# Altium PCB KATADC_V1-3.PcbDoc (part 7 of 7)
Units mm, origin at the board's own origin, x right, y up, seen from the top; angles counter-clockwise.
Board outline 127 x 85.85 mm, 6 copper layers (Top Layer, InnerPlane1, InnerPlane2, InnerPlane3, InnerPlane4, Bottom Layer), stack 1.255 mm thick; 189 components, 188 nets, 905 pads, 1090 vias.
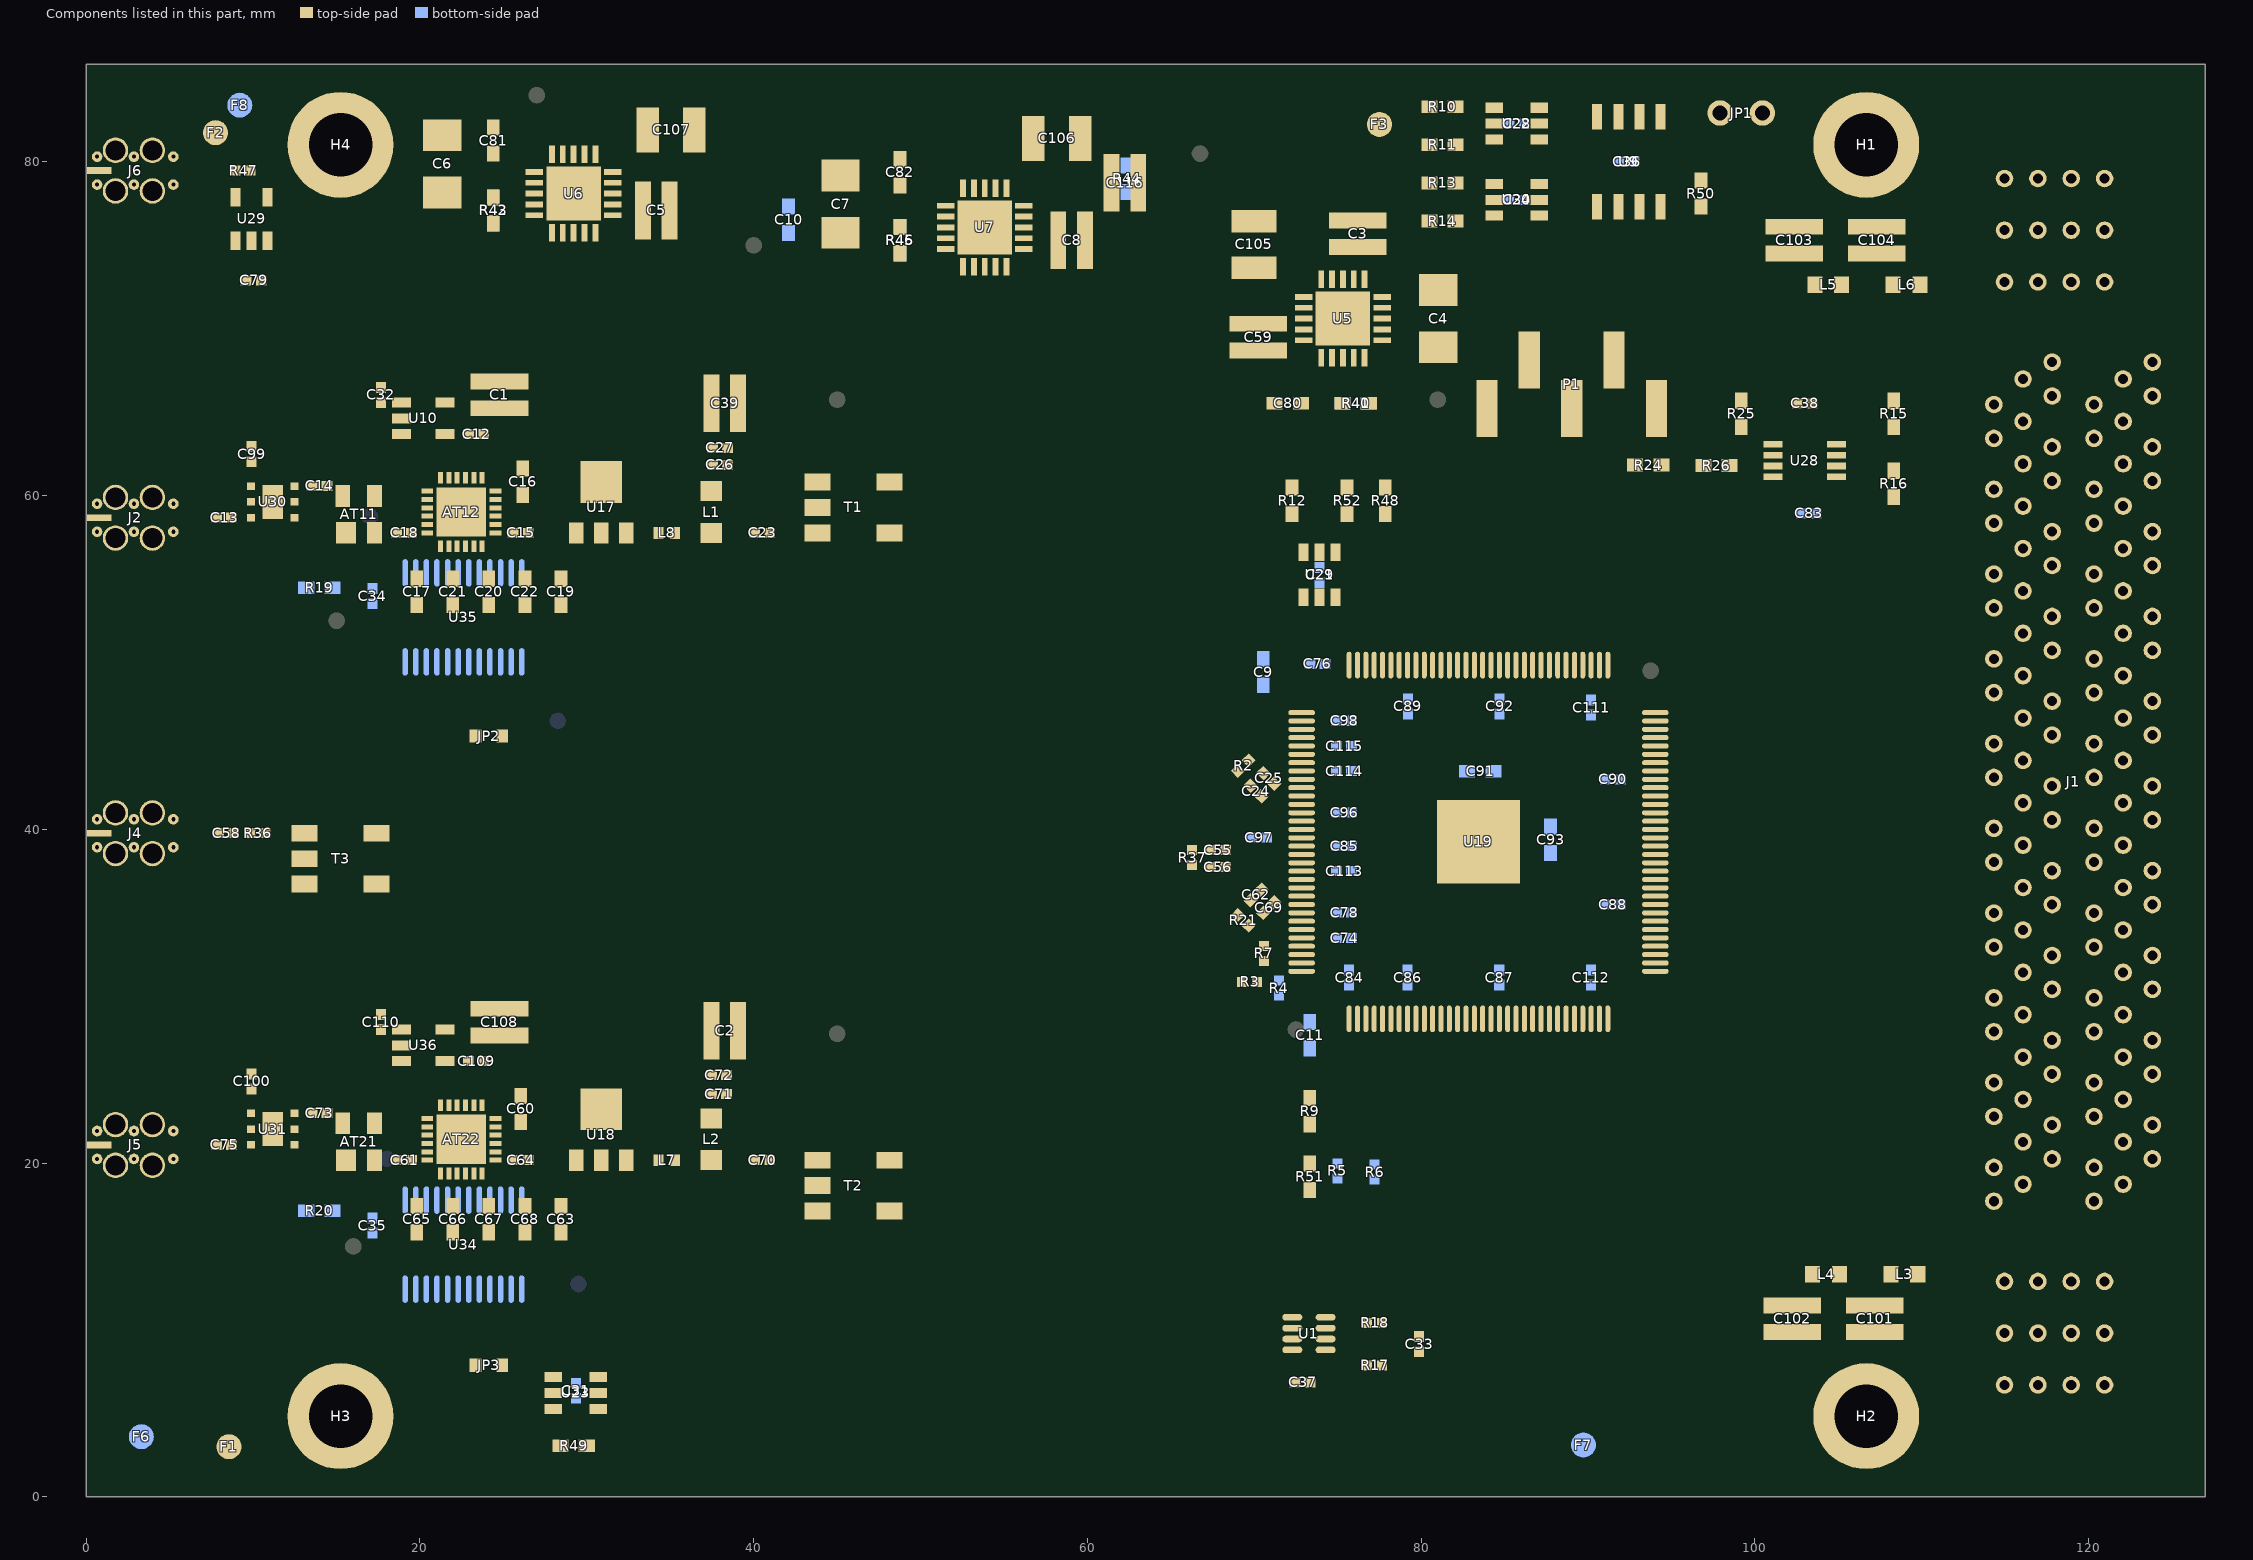
[diagram p11: the components of this part, seen from the top]

## Silkscreen, mask and mechanical layers (free items; w line width, h text height) (continued)
Cut-Drill Drawing:
  drawing of 978 lines, arcs and shapes, not listed
  text "ALL DIMENSIONS IN mm" at 250.443,215.847 h2.79
  text "P C B    F A B R I C A T I O N    N O T E S" at -254.557,214.847 h5
  text "0" at 255.57,213.226 h2.79
  text "5" at 260.57,213.226 h2.79
  text "10" at 264.633,213.226 h2.79
  text "15" at 269.633,213.226 h2.79
  text "20" at 274.633,213.226 h2.79
  text "V-GROOVE DETAIL" at -103.232,210.097 h5
  text "MOUSEBITE BREAKAWAY DETAIL" at 118.068,209.897 h5
  text "CONSTRUCTION" at -252.557,209.847 h3.5
  text "CHAMFER DETAIL" at 12.068,208.897 h5
  text "Scale in Millimeters" at 255.975,207.769 h2.79
  text "FAB SPECIFICATION" at -252.557,205.847 h2.79
  text "IPC-6012 CLASS" at -218.557,205.847 h2.79
  text "1" at -194.557,205.847 h2.79
  text "2" at -188.557,205.847 h2.79
  text "3" at -182.557,205.847 h2.79
  text "MIL-SPEC P-55110" at -168.557,205.847 h2.79
  text "APPLY TO PANELISED PCB IF APPLICABLE" at 127.068,204.897 h2.79
  text "APPLY TO PANELISED PCB IF APPLICABLE AND REQUESTED" at -120.882,204.307 h2.79
  text "LEAD-FREE RoHS" at -252.557,202.847 h2.79
  text "YES TO EU DIRECTIVE" at -215.557,202.847 h2.79
  text "NOT REQD" at -180.557,202.847 h2.79
  text "GOLD FINGER EDGE CONNECTOR" at 10.568,201.647 h2.79
  text "MATERIAL" at -252.557,199.847 h2.79
  text "SEE STACKUP DETAIL" at -218.557,199.847 h2.79
  text "APPLY IF APPLICABLE AND REQUESTED IN NOTES" at 0.318,197.147 h2.79
  text "FINAL PCB THICKNESS" at -252.557,196.847 h2.79
  text "0.8mm" at -215.557,196.847 h2.79
  text "1.2mm" at -201.557,196.847 h2.79
  text "1.6mm" at -189.557,196.847 h2.79
  text "2.4mm" at -176.557,196.847 h2.79
  text "OTHER_____mm" at -163.557,196.847 h2.79
  text "LAYER COUNT" at -252.557,193.847 h2.79
  text "1" at -215.557,193.847 h2.79
  text "2" at -208.557,193.847 h2.79
  text "4" at -201.557,193.847 h2.79
  text "6" at -194.557,193.847 h2.79
  text "8" at -187.557,193.847 h2.79
  text "10" at -180.557,193.847 h2.79
  text "12" at -173.557,193.847 h2.79
  text "OTHER_____" at -163.557,193.847 h2.79
  text "MAIN PCB AREA" at 164.843,193.797 h2.79
  text "PCB WIDTH" at -98.877,192.664 h2.79
  text "V-GROOVE WIDTH" at -81.924,192.664 h2.79
  text "GAP" at -49.033,192.664 h2.79
  text "LAYER STACK-UP" at -252.557,190.847 h2.79
  text "SEE DETAIL DRAWING" at -218.557,190.847 h2.79
  text "0.00mm" at 116.918,189.822 h2.79 r90
  text "3.50mm" at 123.843,189.822 h2.79 r90
  text "4.50mm" at 125.918,189.822 h2.79 r90
  text "1.00mm" at 118.968,189.797 h2.79 r90
  text "2.25mm" at 121.443,189.797 h2.79 r90
  text "0,80mm" at -94.212,188.432 h2.79
  text "0,16mm +/- 0,10mm" at -80.734,188.299 h2.79
  text "0,3mm +/- 0,10mm" at -54.797,188.299 h2.79
  text "IMPEDENCE CONTROL" at -252.557,187.847 h2.79
  text "YES" at -215.557,187.847 h2.79
  text "NO" at -201.557,187.847 h2.79
  text "IF YES, SPECIFY Zo ___100 ohm__" at -190.557,187.847 h2.79
  text "GAP" at -109.721,187.664 h2.79
  text "SPECIAL CORES" at -252.557,184.847 h2.79
  text "YES" at -215.557,184.847 h2.79
  text "NO" at -201.557,184.847 h2.79
  text "SEE STACKUP DETAIL" at -190.557,184.847 h2.79
  text "1,60mm" at -94.212,184.622 h2.79
  text "0,50mm +/- 0,10mm" at -80.877,184.622 h2.79
  text "0,4mm +/- 0,10mm" at -54.842,184.622 h2.79
  text "BOARD EDGE" at -252.557,181.847 h2.79
  text "NO METAL BURRS AND SHARP EDGES" at -218.557,181.847 h2.79
  text "0,80mm +/- 0,10mm" at -80.734,180.934 h2.79
  text "0,5mm +/- 0,10mm" at -54.797,180.934 h2.79
  text "2,40mm" at -94.212,180.812 h2.79
  text "1.75mm" at 146.543,179.772 h2.79 r90
  text "3.0mm" at 201.243,179.022 h2.79 r90
  text "BOW & TWIST" at -252.557,178.847 h2.79
  text "1% MAX ON SMD PCBS" at -218.557,178.847 h2.79
  text "DIA 0,8mm" at 114.613,177.818 h2.79
  text "BREAKAWAY STRIP" at 162.443,176.997 h2.79
  text "O" at 24.398,176.414 h2.79
  text "MAX DEVIATION 0,10mm" at -134.217,176.367 h2.79
  text "PROFILING" at -252.557,175.847 h2.79
  text "NC-ROUTE" at -215.557,175.847 h2.79
  text "V-SCORE" at -194.557,175.847 h2.79
  text "BOTH AS INDICATED" at -173.557,175.847 h2.79
  text "X 5PL" at 116.913,175.718 h2.79
  text "80" at 21.805,175.364 h2.79
  text "1.20mm" at 45.568,170.647 h2.79 r90
  text "MOUSEBITE MUST BE APPLIED WHEREVER                IS INDICATED ON THE PCB" at 99.568,169.897 h3
  text "CONDUCTIVE MATERIAL" at -252.557,169.347 h3.5
  text "CU THICKNESS INTERNAL" at -252.557,165.347 h2.79
  text "18um" at -215.557,165.347 h2.79
  text "35um" at -201.557,165.347 h2.79
  text "70um" at -187.557,165.347 h2.79
  text "______um   FINISHED" at -173.557,165.347 h2.79
  text "CU THICKNESS EXTERNAL" at -252.557,162.347 h2.79
  text "18um" at -215.557,162.347 h2.79
  text "35um" at -201.557,162.347 h2.79
  text "70um" at -187.557,162.347 h2.79
  text "105um         FINISHED" at -173.557,162.347 h2.79
  text "PLATING FINISH" at -252.557,159.347 h2.79
  text "HAL" at -215.557,159.347 h2.79
  text "ENIG" at -201.557,159.347 h2.79
  text "I-Ag (Imm-Silver)" at -187.557,159.347 h2.79
  text "I-Sn (Imm-Tin)" at -163.557,159.347 h2.79
  text "6-Layer PCB StackUp" at -137.887,157.593 h4
  text "SELECTIVE Au PLATING" at -252.557,156.347 h2.79
  text "NO" at -215.557,156.347 h2.79
  text "YES ON EDGE FINGERS" at -201.557,156.347 h2.79
  text "AS INDICATED" at -163.557,156.347 h2.79
  text "Final PCB Thickness 2.4mm" at -137.887,153.093 h4
  text "INTERCONNECTS" at -252.557,149.347 h3.5
  text "Top" at -95.612,148.243 h2.79
  text "8mil Rogers R04003C 0,5oz Copper (Total thickness: 0,237mm)" at -80.366,146.025 h2.79
  text "DRILL PROCESS" at -252.557,145.347 h2.79
  text "THT" at -215.557,145.347 h2.79
  text "BLIND & BURIED VIAS" at -201.557,145.347 h2.79
  text "LASER VIAS" at -163.557,145.347 h2.79
  text "}" at -83.998,144.272 h10.16
  text "Plane #1" at -95.409,142.952 h2.79
  text "HOLE WALL PLATING" at -252.557,142.347 h2.79
  text "AS SPECIFIED IN IPC-6012 CLASS" at -218.557,142.347 h2.79
  text "FINAL HOLE SIZE" at -252.557,139.347 h2.79
  text "AS SPECIFIED IN TABLE, AFTER THRU-HOLE PLATING" at -218.557,139.347 h2.79
  text "7628 Prepreg (Pressed Thickness 0.175mm)" at -95.409,137.974 h2.79
  text "MIN HOLE SIZE (mm)" at -252.557,136.347 h2.79
  text "0.10" at -215.557,136.347 h2.79
  text "0.15" at -201.557,136.347 h2.79
  text "0.2" at -187.557,136.347 h2.79
  text "0.25" at -173.557,136.347 h2.79
  text "LARGER" at -159.557,136.347 h2.79
  text "TOTAL HOLE COUNT" at -252.557,133.347 h2.79
  text "7" at -219.057,133.347 h2.79
  text "Plane #2" at -95.612,132.818 h2.79
  text "1.6mm FR-4 (1oz Copper)" at -80.416,130.197 h2.79
  text "QTY SIGNAL LAYERS" at -253.057,128.847 h2.79
  text "1" at -215.557,128.847 h2.79
  text "2" at -208.557,128.847 h2.79
  text "3" at -201.557,128.847 h2.79
  text "4" at -194.557,128.847 h2.79
  text "5" at -187.557,128.847 h2.79
  text "6" at -180.557,128.847 h2.79
  text "7" at -173.557,128.847 h2.79
  text "8" at -166.557,128.847 h2.79
  text "9" at -159.557,128.847 h2.79
  text "10" at -152.557,128.847 h2.79
  text "}" at -84.049,128.444 h10.16
  text "Plane #3" at -95.612,127.818 h2.79
  text "QTY COPPER PLANES" at -253.057,125.847 h2.79
  text "0" at -215.557,125.847 h2.79
  text "1" at -208.557,125.847 h2.79
  text "2" at -201.557,125.847 h2.79
  text "3" at -194.557,125.847 h2.79
  text "4" at -187.557,125.847 h2.79
  text "5" at -180.557,125.847 h2.79
  text "6" at -173.557,125.847 h2.79
  text "7628 Prepreg (Pressed Thickness 0.175mm)" at -95.409,122.974 h2.79
  text "MIN TRACE WIDTH (mm)" at -253.057,122.847 h2.79
  text "0.10" at -215.557,122.847 h2.79
  text "0.125" at -201.557,122.847 h2.79
  text "0.15" at -187.557,122.847 h2.79
  text "0.175" at -173.557,122.847 h2.79
  text "LARGER" at -159.557,122.847 h2.79
  text "MIN TRACE SPACING (mm)" at -253.057,119.847 h2.79
  text "0.10" at -215.557,119.847 h2.79
  text "0.125" at -201.557,119.847 h2.79
  text "0.15" at -187.557,119.847 h2.79
  text "0.175" at -173.557,119.847 h2.79
  text "LARGER" at -159.557,119.847 h2.79
  text "Plane #4" at -95.612,117.818 h2.79
  text "8mil Rogers R04003C 0,5oz Copper (Total thickness: 0,237mm)" at -80.416,115.197 h2.79
  text "}" at -84.049,113.444 h10.16
  text "COSMETICS" at -252.557,113.347 h3.5
  text "Bottom" at -95.612,112.818 h2.79
  text "SOLDERMASK SIDES" at -252.557,109.847 h2.79
  text "TOP" at -215.557,109.847 h2.79
  text "BOT" at -201.557,109.847 h2.79
  text "BOTH SIDES" at -187.557,109.847 h2.79
  text "SOLDER MASK TYPE" at -252.557,106.847 h2.79
  text "SOLDER MASK OVER BARE COPPER (SMOBC)" at -218.557,106.847 h2.79
  text "SOLDER MASK COLOUR" at -252.557,103.847 h2.79
  text "GRN" at -215.557,103.847 h2.79
  text "BLUE" at -201.557,103.847 h2.79
  text "YEL" at -187.557,103.847 h2.79
  text "RED" at -173.557,103.847 h2.79
  text "BLACK" at -159.557,103.847 h2.79
  text "SOLDERMASK WEBBING" at -252.557,100.847 h2.79
  text "GANG RELIEF NOT ALLOWED, UNLESS BELOW CAPABILITY" at -218.557,100.847 h2.79
  text "SILKSCREEN COLOUR" at -252.557,95.847 h2.79
  text "WHITE" at -215.557,95.847 h2.79
  text "YEL" at -201.557,95.847 h2.79
  text "OTHER ____________" at -187.557,95.847 h2.79
  text "SILKSCREEN PRINT" at -252.557,92.847 h2.79
  text "NO LEGEND TO BE APPLIED OVER SOLDER PADS" at -218.557,92.847 h2.79
  text "SILKSCREEN QTY" at -252.557,89.847 h2.79
  text "TOP" at -215.557,89.847 h2.79
  text "BOT" at -201.557,89.847 h2.79
  text "BOTH SIDES" at -187.557,89.847 h2.79
  text "NONE" at -159.557,89.847 h2.79
  text "SILKSCREEN LINE WIDTH" at -252.557,86.847 h2.79
  text "0.175mm" at -215.557,86.847 h2.79
  text "0.2mm" at -201.557,86.847 h2.79
  text "SILKSCREEN OVER PADS" at -252.557,83.847 h2.79
  text "NOT PERMITTED, PLEASE REMOVE IF PRESENT" at -218.557,83.847 h2.79
  text "MANUFACTURING DEVIATIONS" at -252.557,76.847 h3.5
  text "PAD REMOVAL" at -252.557,72.847 h2.79
  text "ALLOWED ON UNUSED PADS ON INNER LAYERS" at -218.557,72.847 h2.79
  text "TEARDROPPING" at -252.557,69.847 h2.79
  text "PREFERRED, APPLY PLEASE" at -218.557,69.847 h2.79
  text "THIEVING" at -252.557,66.847 h2.79
  text "ALLOWED ON PANEL STRIPS" at -218.557,66.847 h2.79
  text "VIA SIZE REDUCTION" at -252.557,63.847 h2.79
  text "NOT ALLOWED" at -218.557,63.847 h2.79
  text "ADDITIONAL REQUIREMENTS" at -252.557,56.847 h3.5
  text "ELECTRICAL TEST" at -252.557,52.847 h2.79
  text "NONE" at -215.557,52.847 h2.79
  text "FIXTURE" at -201.557,52.847 h2.79
  text "FLYING PROBE" at -183.557,52.847 h2.79
  text "MANUFACTURER LOGO" at -252.557,49.847 h2.79
  text "YES" at -215.557,49.847 h2.79
  text "NO" at -201.557,49.847 h2.79
  text "BATCH No ON S/SCREEN" at -252.557,46.847 h2.79
  text "YES" at -215.557,46.847 h2.79
  text "NO" at -201.557,46.847 h2.79
  text "CERTIFICATE REQ'D" at -252.557,43.847 h2.79
  text "E-TEST" at -215.557,43.847 h2.79
  text "UL" at -201.557,43.847 h2.79
  text "IPC-6011/12" at -189.557,43.847 h2.79
  text "MIL-SPEC P-55110" at -169.557,43.847 h2.79
  text "MANUFACTURING DATA" at -254.557,29.847 h3.5
  text "FILENAME.EXT:" at -218.837,24.918 h3.5
  text ".GERBER FILENAME" at -191.837,24.918 h3.5
  text "GERBER DATA" at -252.557,24.847 h3.5
  text "TOP COPPER" at -252.557,20.847 h2.79
  text "YES" at -210.557,20.847 h2.79
  text "NO" at -198.557,20.847 h2.79
  text ". GTL" at -189.557,20.847 h2.79
  text "BOTTOM COPPER" at -252.557,17.847 h2.79
  text "YES" at -210.557,17.847 h2.79
  text "NO" at -198.557,17.847 h2.79
  text ". GBL" at -189.557,17.847 h2.79
  text "MIDLAYER SIGNAL #1" at -252.557,14.847 h2.79
  text "YES" at -210.557,14.847 h2.79
  text "NO" at -198.557,14.847 h2.79
  text ". G1" at -189.557,14.847 h2.79
  text "MIDLAYER SIGNAL #2" at -252.557,11.847 h2.79
  text "YES" at -210.557,11.847 h2.79
  text "NO" at -198.557,11.847 h2.79
  text ". G2" at -189.557,11.847 h2.79
  text "MIDLAYER SIGNAL #3" at -252.557,8.847 h2.79
  text "YES" at -210.557,8.847 h2.79
  text "NO" at -198.557,8.847 h2.79
  text ". G3" at -189.557,8.847 h2.79
  text "MIDLAYER SIGNAL #4" at -252.557,5.847 h2.79
  text "YES" at -210.557,5.847 h2.79
  text "NO" at -198.557,5.847 h2.79
  text ". G4" at -189.557,5.847 h2.79
  text "MIDLAYER SIGNAL #5" at -252.557,2.847 h2.79
  text "YES" at -210.557,2.847 h2.79
  text "NO" at -198.557,2.847 h2.79
  text ". G5" at -189.557,2.847 h2.79
  text "MIDLAYER SIGNAL #6" at -252.557,-0.153 h2.79
  text "YES" at -210.557,-0.153 h2.79
  text "NO" at -198.557,-0.153 h2.79
  text ". G6" at -189.557,-0.153 h2.79
  text "MIDLAYER SIGNAL #7" at -252.557,-3.153 h2.79
  text "YES" at -210.557,-3.153 h2.79
  text "NO" at -198.557,-3.153 h2.79
  text ". G7" at -189.557,-3.153 h2.79
  text "MIDLAYER SIGNAL #8" at -252.557,-6.153 h2.79
  text "YES" at -210.557,-6.153 h2.79
  text "NO" at -198.557,-6.153 h2.79
  text ". G8" at -189.557,-6.153 h2.79
  text "MIDLAYER SIGNAL #9" at -252.557,-9.153 h2.79
  text "YES" at -210.557,-9.153 h2.79
  text "NO" at -198.557,-9.153 h2.79
  text ". G9" at -189.557,-9.153 h2.79
  text "MIDLAYER SIGNAL #10" at -252.557,-12.153 h2.79
  text "YES" at -210.557,-12.153 h2.79
  text "NO" at -198.557,-12.153 h2.79
  text ". G10" at -189.557,-12.153 h2.79
  text "GND/PWR PLANE #1" at -252.557,-15.153 h2.79
  text "YES" at -210.557,-15.153 h2.79
  text "NO" at -198.557,-15.153 h2.79
  text ". GP1" at -189.557,-15.153 h2.79
  text "GND/PWR PLANE #2" at -252.557,-18.153 h2.79
  text "YES" at -210.557,-18.153 h2.79
  text "NO" at -198.557,-18.153 h2.79
  text ". GP2" at -189.557,-18.153 h2.79
  text "GND/PWR PLANE #3" at -252.557,-21.153 h2.79
  text "YES" at -210.557,-21.153 h2.79
  text "NO" at -198.557,-21.153 h2.79
  text ". GP3" at -189.557,-21.153 h2.79
  text "GND/PWR PLANE #4" at -252.557,-24.153 h2.79
  text "YES" at -210.557,-24.153 h2.79
  text "NO" at -198.557,-24.153 h2.79
  text ". GP4" at -189.557,-24.153 h2.79
  text "GND/PWR PLANE #5" at -252.557,-27.153 h2.79
  text "YES" at -210.557,-27.153 h2.79
  text "NO" at -198.557,-27.153 h2.79
  text ". GP5" at -189.557,-27.153 h2.79
  text "GND/PWR PLANE #6" at -252.557,-30.153 h2.79
  text "YES" at -210.557,-30.153 h2.79
  text "NO" at -198.557,-30.153 h2.79
  text ". GP6" at -189.557,-30.153 h2.79
  text "TOP SOLDER MASK" at -252.557,-36.153 h2.79
  text "YES" at -210.557,-36.153 h2.79
  text "NO" at -198.557,-36.153 h2.79
  text ". GTS" at -189.557,-36.153 h2.79
  text "BOTTOM SOLDER MASK" at -252.557,-39.153 h2.79
  text "YES" at -210.557,-39.153 h2.79
  text "NO" at -198.557,-39.153 h2.79
  text ". GBS" at -189.557,-39.153 h2.79
  text "TOP OVERLAY" at -252.557,-42.153 h2.79
  text "YES" at -210.557,-42.153 h2.79
  text "NO" at -198.557,-42.153 h2.79
  text ". GTO" at -189.557,-42.153 h2.79
  text "BOTTOM OVERLAY" at -252.557,-45.153 h2.79
  text "YES" at -210.557,-45.153 h2.79
  text "NO" at -198.557,-45.153 h2.79
  text ". GBO" at -189.557,-45.153 h2.79
  text "TOP SOLDER PASTE" at -252.557,-48.153 h2.79
  text "YES" at -210.557,-48.153 h2.79
  text "NO" at -198.557,-48.153 h2.79
  text ". GTP" at -189.557,-48.153 h2.79
  text "BOTTOM SOLDER PASTE" at -252.557,-51.153 h2.79
  text "YES" at -210.557,-51.153 h2.79
  text "NO" at -198.557,-51.153 h2.79
  text ". GBP" at -189.557,-51.153 h2.79
  text "TOP SELECTIVE GOLD" at -252.557,-54.153 h2.79
  text "YES" at -210.557,-54.153 h2.79
  text "NO" at -198.557,-54.153 h2.79
  text ". GTG" at -189.557,-54.153 h2.79
  text "BOTTOM SELECTIVE GOLD" at -252.557,-57.153 h2.79
  text "YES" at -210.557,-57.153 h2.79
  text "NO" at -198.557,-57.153 h2.79
  text ". GBG" at -189.557,-57.153 h2.79
  text "TOP PEELABLE BLUE" at -252.557,-60.153 h2.79
  text "YES" at -210.557,-60.153 h2.79
  text "NO" at -198.557,-60.153 h2.79
  text ". GTB" at -189.557,-60.153 h2.79
  text "BOTTOM PEELABLE BLUE" at -252.557,-63.153 h2.79
  text "YES" at -210.557,-63.153 h2.79
  text "NO" at -198.557,-63.153 h2.79
  text ". GBB" at -189.557,-63.153 h2.79
  text "MANUFACTURING DRAWING" at -252.557,-69.153 h2.79
  text "PCB FILENAME . PDF" at -182.557,-69.153 h2.79
  text "DRILL SET #1 (THP)" at -252.557,-72.153 h2.79
  text "YES" at -210.557,-72.153 h2.79
  text "NO" at -198.557,-72.153 h2.79
  text "FILENAME PLATED . TXT" at -187.057,-72.153 h2.79
  text "DRILL SET #2 (N-THP)" at -252.557,-75.153 h2.79
  text "YES" at -210.557,-75.153 h2.79
  text "NO" at -198.557,-75.153 h2.79
  text "FILENAME NONPLATED . TXT" at -192.557,-75.153 h2.79
  text "DRILL SET #3 (BLIND1)" at -252.557,-78.153 h2.79
  text "YES" at -210.557,-78.153 h2.79
  text "NO" at -198.557,-78.153 h2.79
  text "FILENAME BLIND1 . TXT" at -186.057,-78.153 h2.79
  text "DRILL SET #4 (BLIND2)" at -252.557,-81.153 h2.79
  text "YES" at -210.557,-81.153 h2.79
  text "NO" at -198.557,-81.153 h2.79
  text "FILENAME BLIND2 . TXT" at -186.057,-81.153 h2.79
  text "DRILL SET #5 (BURIED1)" at -252.557,-84.153 h2.79
  text "YES" at -210.557,-84.153 h2.79
  text "NO" at -198.557,-84.153 h2.79
  text "FILENAME BURIED1 . TXT" at -188.057,-84.153 h2.79
  text "DRILL SET #6 (BURIED2)" at -252.557,-87.153 h2.79
  text "YES" at -210.557,-87.153 h2.79
  text "NO" at -198.557,-87.153 h2.79
  text "FILENAME BURIED2 . TXT" at -188.057,-87.153 h2.79
  text ".GERBER FILENAME" at -202.087,-93.082 h2.79
  text ".MANUFACTURE.ZIP" at -184.087,-93.082 h2.79
  text "MANUFACTURING ZIP FILENAME:" at -252.557,-93.153 h2.79
  text "THIS DOCUMENT IS THE PROPERTY OF SKA,  AND MAY NOT BE COPIED OR USED FOR ANY PURPOSE OTHER THAN THAT FOR WHICH IT IS SUPPLIED WITHOUT PERMISSION IN WRITING FROM THE OWNER." at 280.413,-98.582 h3 r90
  text "SPECIAL INSTRUCTIONS" at -254.557,-102.153 h3.5
  text ".COPYRIGHT_YEAR" at 280.413,-106.682 h3 r90
  text "1)  NC-ROUTE AS INDICATED." at -251.557,-107.153 h2.79
  text "C" at 280.713,-110.482 h3 r90
  text "2)  NOTE PCB THICKNESS MAX 2.4mm" at -251.557,-111.153 h2.79
  text "3)  NOTE SPECIAL CORES REQUIRED." at -251.557,-115.153 h2.79
  text "SCALE:" at 261.844,-116.44 h2.79
  text "ORIG" at 273.649,-117.472 h2.79
  text "DATE:" at 45.913,-117.582 h3
  text ".PCB_Title_Date" at 62.913,-117.582 h3
  text "4)" at -251.557,-119.153 h2.79
  text "PCB NAME:" at 172.413,-120.082 h2.79
  text "NTS" at 264.759,-120.587 h3.05
  text "A2" at 273.649,-121.222 h2.79
  text ".PCB_Title_Description" at 191.913,-121.582 h7.5
  text "5)" at -251.557,-123.153 h2.79
  text "DRAWN BY:" at 45.913,-124.082 h3
  text ".PCB_Title_DrawnBy" at 63.413,-124.082 h3
  text "SHEET:" at 261.844,-126.44 h2.79
  text "DOC NUMBER:" at 172.413,-128.582 h2.79
  text "ENGINEER:" at 45.913,-130.082 h3
  text ".PCB_Title_Engineer" at 63.413,-130.082 h3
  text ".PCB_Title_DocumentNumber" at 197.413,-130.082 h7.5
  text "1 of 1" at 267.443,-131.153 h4
  text "PCB FILENAME:" at 215.443,-135.43 h2.79
  text "PROJECT FILENAME:" at 170.231,-135.583 h2.79
  text "ECO No.:" at 45.913,-136.082 h3
  text "-" at 62.913,-136.082 h3
  text "REVISION:" at 261.844,-136.44 h2.79
  text ".PROJECT_Filename" at 180.913,-140.082 h3
  text ".PCB_Title_Filename" at 224.913,-140.082 h3
  text "ALTIUM DESIGNER S09" at -118.932,-140.603 h2.75
  text "EDA TECHNOLOGIES" at -58.432,-140.603 h2.79
  text ".Print_Date" at 13.068,-140.603 h2.79
  text ".Print_Time" at 27.568,-140.603 h2.79
  text "DESIGNED WITH:" at -141.432,-141.103 h2.75
  text "CAD DESIGN BY:" at -80.432,-141.103 h2.75
  text "DATESTAMP OF THIS PRINT:" at -22.932,-141.103 h2.75
  text "APPROVED:" at 45.663,-141.082 h3
  text "A" at 269.443,-141.153 h5
  text "SKA" at 78.443,-143.153 h15
Drill Drawing:
  text ".Legend" at -140.337,-132.582 h1.52

## Dimensions
0,0 to 15.24,4.826 on Cut-Drill Drawing
0,0 to 15.24,4.826 on Cut-Drill Drawing

## Text inside footprints (layer, text, board x,y; h text height)
C59: Assembly Top "C116" at 69.869,70.091 h0.64 r270